# Altium PCB obc-comm.PcbDoc (part 1 of 2)
Units mm, origin at the board's own origin, x right, y up, seen from the top; angles counter-clockwise.
Board outline 60.02 x 35 mm, 4 copper layers (Top Layer, GND, VCC, Bottom Layer), stack 1.11 mm thick; 70 components, 62 nets, 294 pads, 175 vias.
Unrouted connection lines stored in the file: 79.
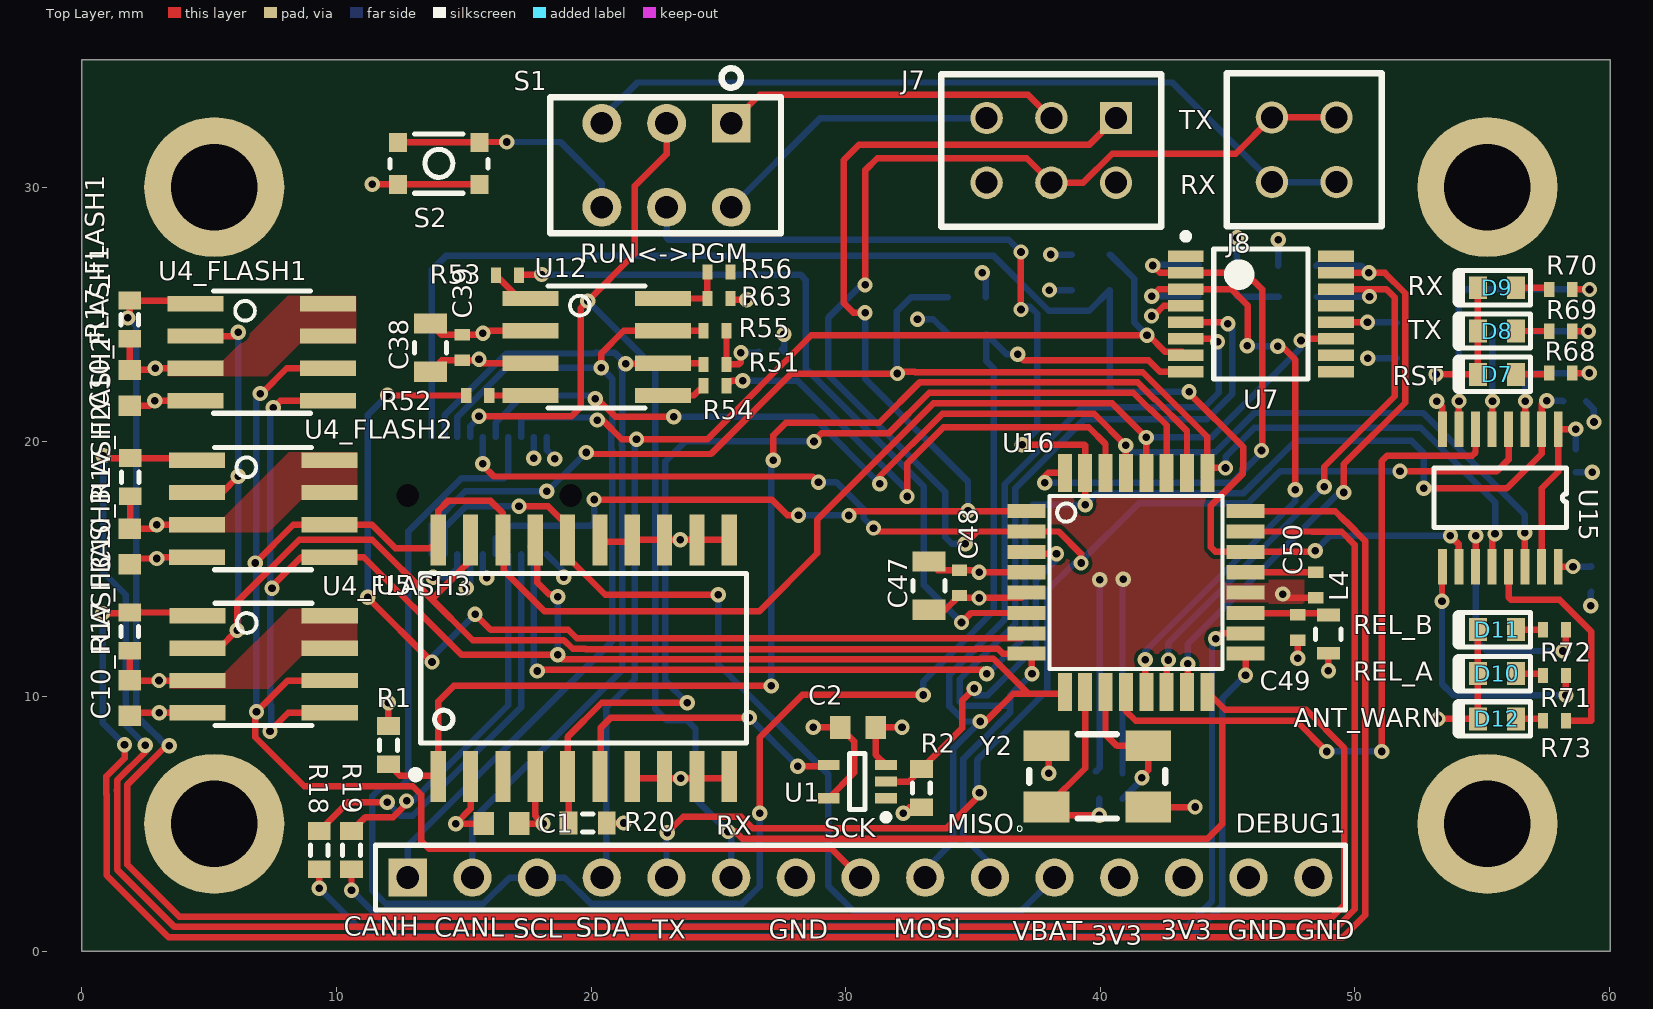
[diagram p0: Top Layer view]
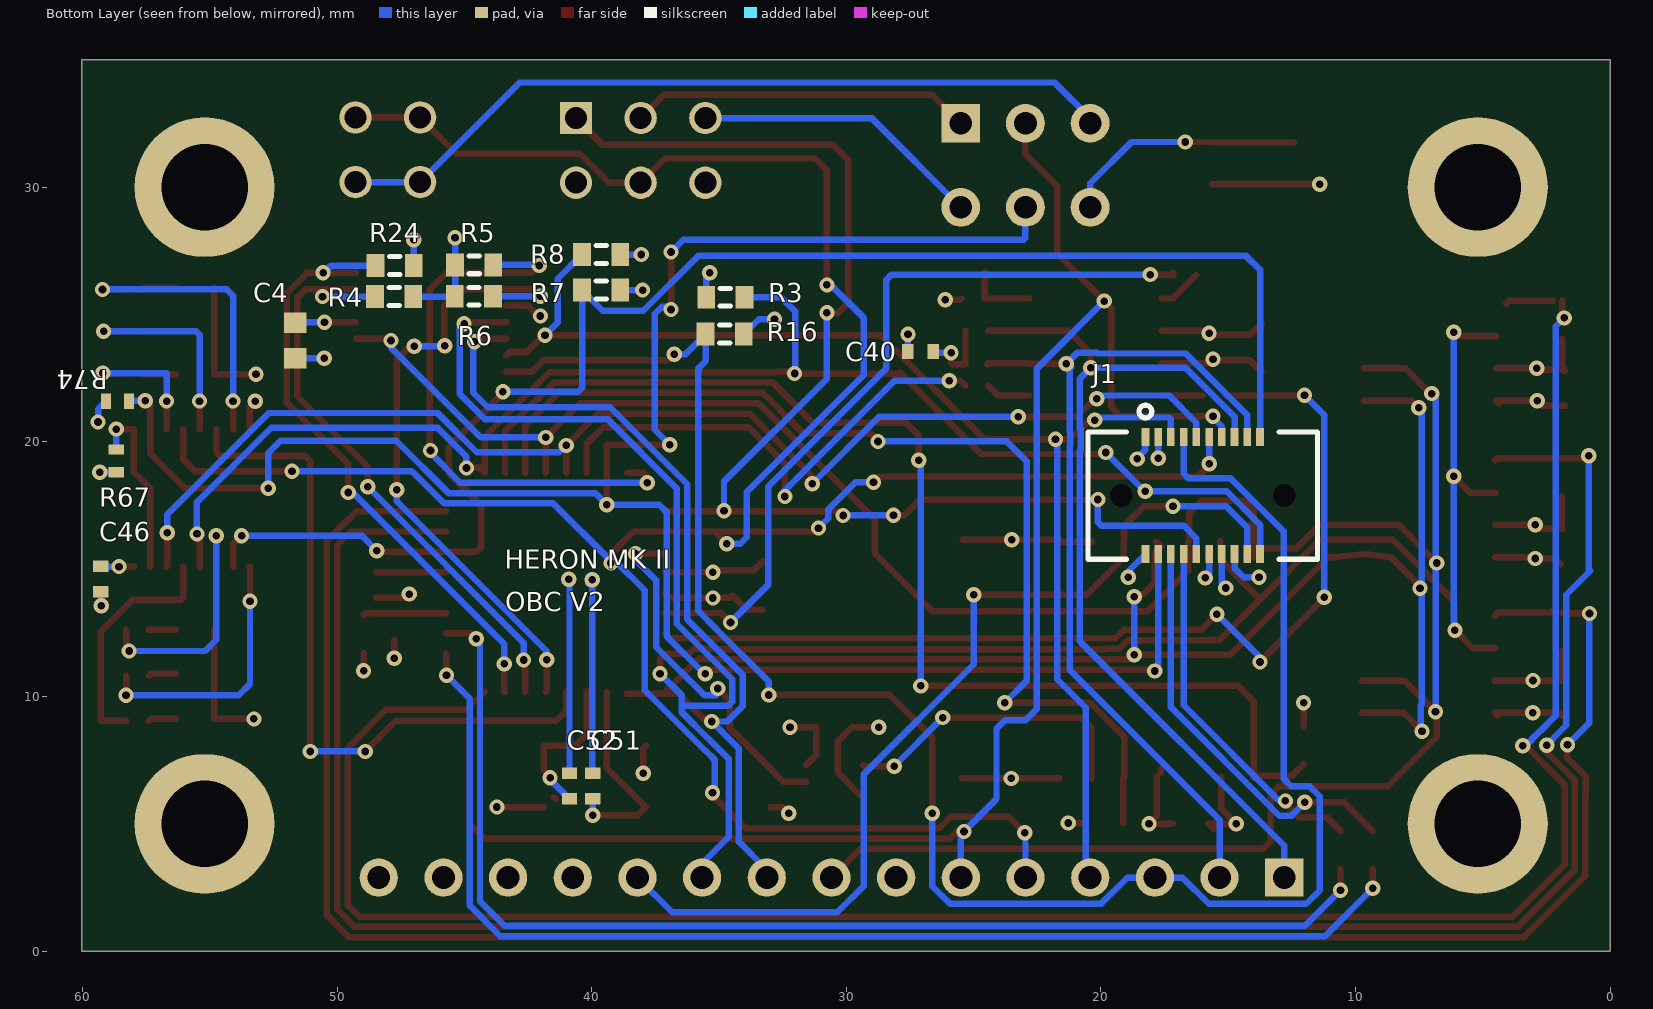
[diagram p1: Bottom Layer view, seen from below]
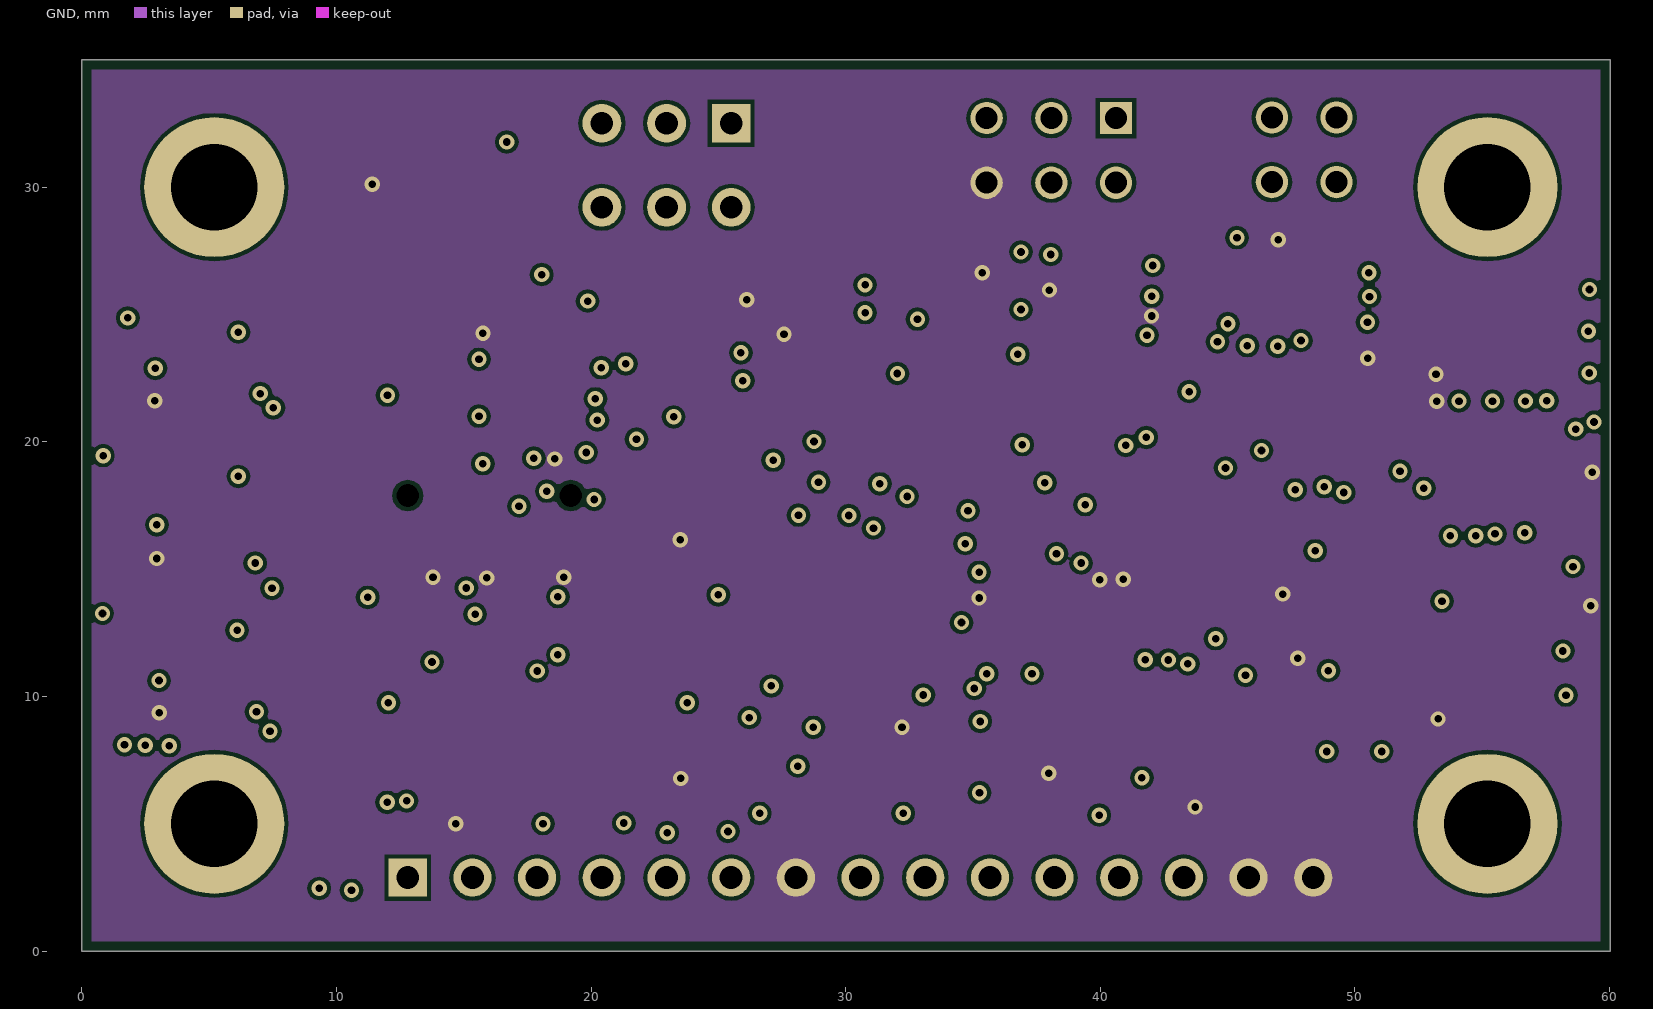
[diagram p2: GND]
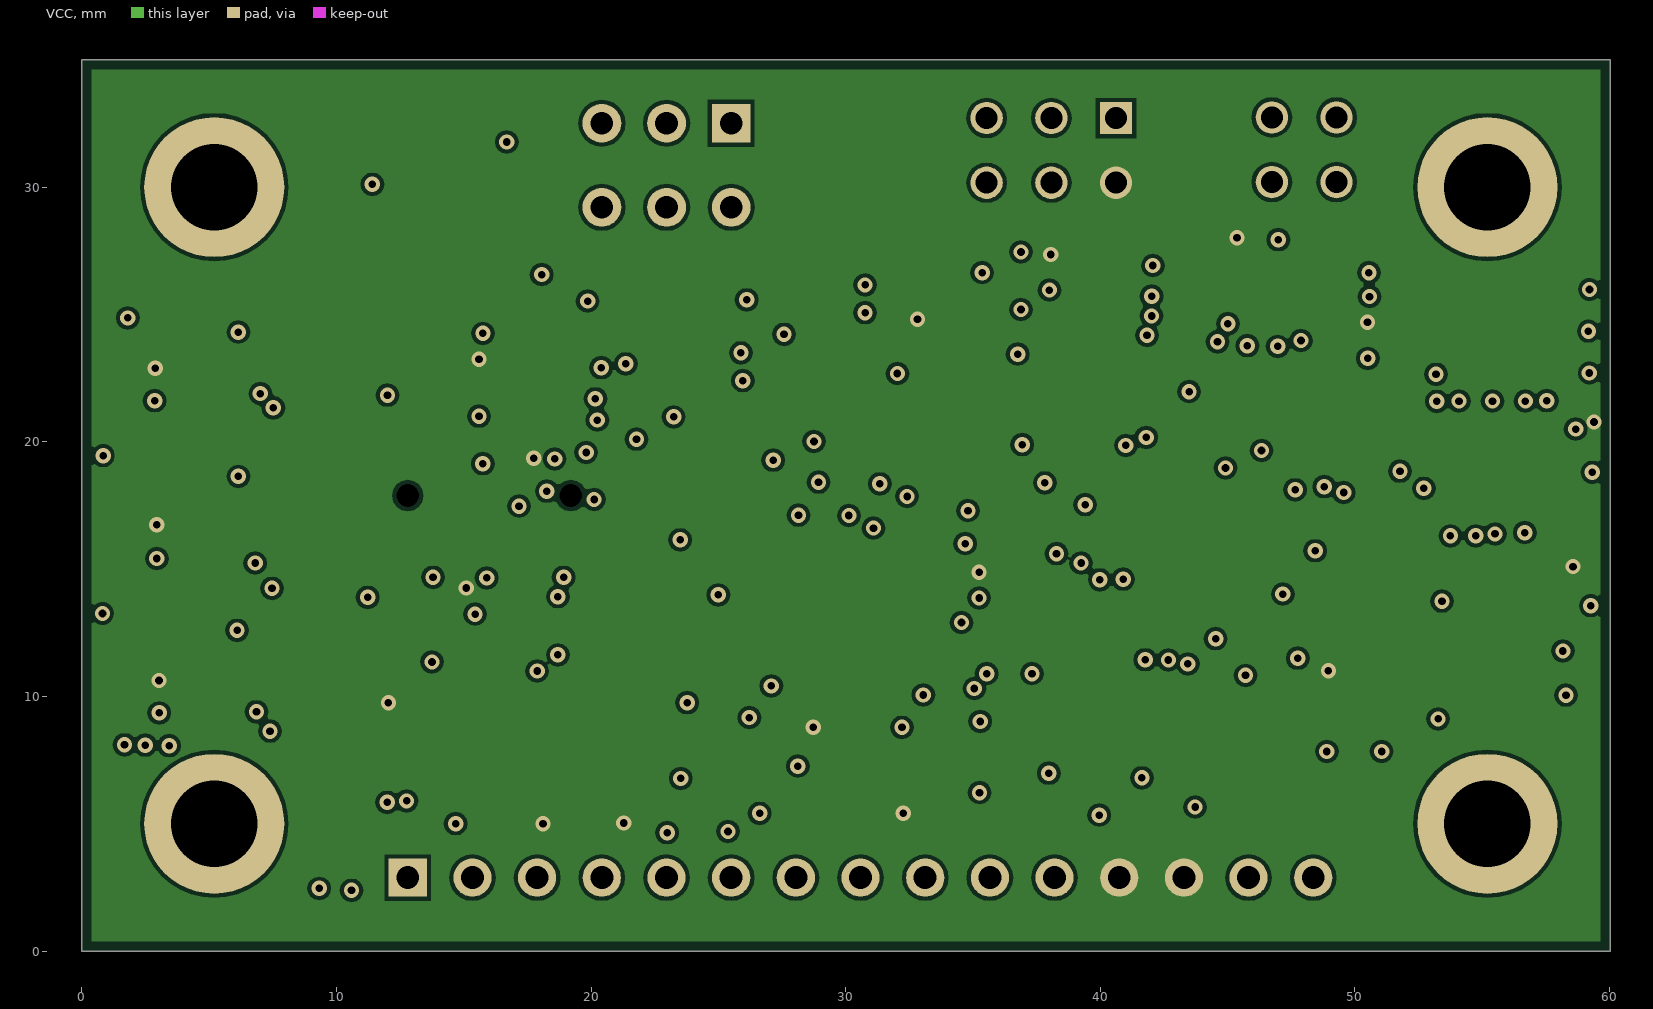
[diagram p3: VCC]
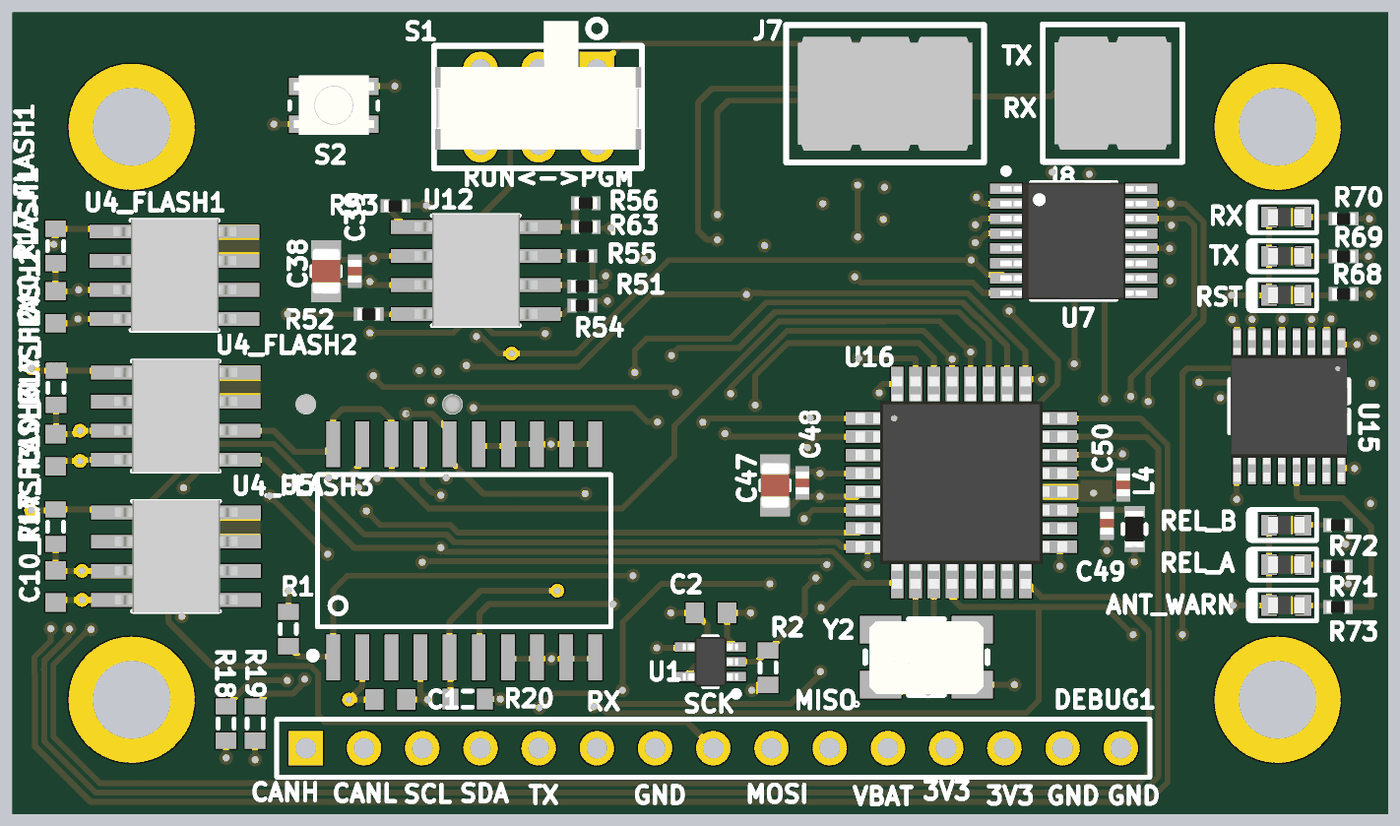
[diagram p4: 3D render of the assembled board from above, using the file's embedded part models]

## Layer stack, top to bottom
Top Solder: solder mask 0.0254, SM-001, Dk 4
Top Layer: signal copper 0.035
Dielectric 1: prepreg 0.1295, PP-017, Dk 4.3
GND: signal copper 0.035
Dielectric 3: core 0.7112, Core-039, Dk 4.8
VCC: signal copper 0.035
Dielectric 5: prepreg 0.1295, PP-017, Dk 4.3
Bottom Layer: signal copper 0.035
Bottom Solder: solder mask 0.0254, SM-001, Dk 4

## Board outline
0,0 0,35.001 60.02,35.001 60.02,0

## Design rules (kind name [scope] priority, off if disabled: settings)
AssemblyTestPointUsage [All] p1 off:
AssemblyTestpoint [All] p1 off: testpointundercomponent=TRUE minsize=1.016 maxsize=2.54 preferedsize=1.524 minholesize=0 maxholesize=1.016 preferedholesize=0.813 testpointgrid=0.025 usegrid=TRUE gridtolerance=0 allowsidetop=TRUE allowsidebottom=TRUE
BoardOutlineClearance [OnLayer('VCC') or OnLayer('GND')] p1: gap=0.508 ignorepadtopadclearanceinfootprint=FALSE // Inner layer clearance
BoardOutlineClearance BoardOutlineClearance_1 [All] p2: gap=0.381 ignorepadtopadclearanceinfootprint=FALSE // top and bottom layers
Clearance [All] p1: gap=0.152 ignorepadtopadclearanceinfootprint=FALSE
FabricationTestPointUsage [All] p1 off: valid=0 allowmultiple=FALSE
FabricationTestpoint [All] p1 off: side=3 testpointundercomponent=FALSE minsize=1.016 maxsize=2.54 preferedsize=1.524 minholesize=0 maxholesize=1.016 preferedholesize=0.813 testpointgrid=0.025 allowsidetop=TRUE allowsidebottom=TRUE usegrid=TRUE gridtolerance=0
Height [All] p1: minheight=0 maxheight=15 prefheight=12.7
HoleSize [All] p1: absolutevalues=TRUE maxlimit=6.3 minlimit=0.3 maxpercent=80.000 minpercent=20.000
HoleToHoleClearance [All] p1: gap=0.254 allowstackedmicrovias=FALSE
MinimumAnnularRing [All] p1: minimumring=0.15
MinimumSolderMaskSliver [All] p1: minsoldermaskwidth=0.102
PlaneConnect [All] p1: planeconnectstyle=Direct reliefexpansion=0.508 reliefentries=4 reliefconductorwidth=0.254 reliefairgap=0.254
PolygonConnect [All] p1: connectstyle=Direct reliefconductorwidth=0.254 reliefentries=4 polygonreliefangle="90 Angle" airgapwidth=0.254
RoomDefinition obc_main_3.0 [InComponentClass('obc_main_3.0')] p1: confinementstyle=ConfineIn formatcopy=TRUE lockcomponents=FALSE outline 8.468,2.458 8.468,5.466 11.146,5.466 11.146,21.794 33.243,21.794 33.243,26.533 38.12,26.533 38.12,26.813 41.128,26.813 41.128,4.509 49.984,4.509 49.984,1.261 11.176,1.261 11.176,2.458
RoomDefinition U_obc_rtc [InComponentClass('U_obc_rtc')] p2: confinementstyle=ConfineIn formatcopy=TRUE lockcomponents=FALSE outline 11.186,6.583 11.186,9.591 12.552,9.591 12.552,17.469 26.464,17.469 26.464,9.642 31.984,9.642 31.984,8.284 32.534,8.284 32.534,7.905 33.823,7.905 33.823,4.897 32.534,4.897 32.534,4.751 21.367,4.751 21.367,4.175 17.989,4.175 17.989,4.15 14.981,4.15 14.981,5.534 12.552,5.534 12.552,6.583
RoomDefinition U_micro-circuit-ATMEGA64M1 [InComponentClass('U_micro-circuit-ATMEGA64M1')] p3: confinementstyle=ConfineIn formatcopy=TRUE lockcomponents=FALSE outline 11.742,29.383 11.742,32.491 18.009,32.491 18.009,35.052 27.838,35.052 27.838,34.823 42.774,34.823 42.774,28.067 27.838,28.067 27.838,27.813 18.009,27.813 18.009,29.383
RoomDefinition ATMEGA64M1 [InComponentClass('ATMEGA64M1')] p4: confinementstyle=ConfineIn formatcopy=TRUE lockcomponents=FALSE outline 32.295,12.747 32.295,15.955 36.035,15.955 36.035,19.845 36.035,22.144 57.719,22.144 59.527,22.144 59.527,21.036 49.81,21.036 49.81,11.192 46.769,11.192 46.769,9.111 43.446,9.111 43.446,4.29 36.31,4.29 36.31,9.111 36.035,9.111 36.035,12.747
RoomDefinition U_obc_spi_to_i2c [InComponentClass('U_obc_spi_to_i2c')] p5: confinementstyle=ConfineIn formatcopy=TRUE lockcomponents=FALSE outline 33.269,23.378 33.269,25.086 38.12,25.086 38.12,28.21 42.125,28.21 42.125,28.573 50.483,28.573 50.483,25.482 52.492,25.482 52.492,22.474 50.483,22.474 50.483,21.94 42.125,21.94 42.125,23.378
RoomDefinition FLASH3 [InComponentClass('FLASH3')] p6: confinementstyle=ConfineIn formatcopy=TRUE lockcomponents=FALSE outline 1.444,8.439 1.444,11.447 1.462,11.447 1.462,14.052 3.17,14.052 3.17,14.016 11.153,14.016 11.153,8.505 3.152,8.505 3.152,8.439
RoomDefinition FLASH2 [InComponentClass('FLASH2')] p7: confinementstyle=ConfineIn formatcopy=TRUE lockcomponents=FALSE outline 1.366,17.109 1.366,20.117 3.104,20.117 3.104,20.129 11.139,20.129 11.139,14.618 3.119,14.618 3.119,14.392 1.411,14.392 1.411,17.109
RoomDefinition FLASH1 [InComponentClass('FLASH1')] p8: confinementstyle=ConfineIn formatcopy=TRUE lockcomponents=FALSE outline 1.386,23.296 1.386,26.304 3.094,26.304 3.094,26.276 11.088,26.276 11.088,20.765 3.115,20.765 3.115,20.716 1.407,20.716 1.407,23.296
RoomDefinition U_can-SN65HVD233 [InComponentClass('U_can-SN65HVD233')] p9: confinementstyle=ConfineIn formatcopy=TRUE lockcomponents=FALSE outline 12.712,22.094 12.712,25.302 15.809,25.302 15.809,27.097 24.115,27.097 24.115,27.224 25.923,27.224 25.923,24.1 28.055,24.1 28.055,22.992 25.771,22.992 25.771,21.646 24.236,21.646 24.236,20.968 16.201,20.968 16.201,21.265 14.646,21.265 14.646,22.094
RoomDefinition micro-circuit- [InComponentClass('micro-circuit-')] p10: confinementstyle=ConfineIn formatcopy=TRUE lockcomponents=FALSE outline 53.572,8.088 53.572,13.653 53.572,27.082 57.254,27.082 57.254,26.538 58.986,26.538 58.986,20.157 59.228,20.157 59.228,15.584 59.838,15.584 59.838,13.626 58.74,13.626 58.74,8.488 57.254,8.488 57.254,8.088
RoutingVias [All] p1: holewidth=0.3 width=0.6 viastyle="Through Hole" minholewidth=0.2 minwidth=0.6 maxholewidth=6.3 maxwidth=10
SilkToSilkClearance [All] p1: silktosilkclearance=0
SilkToSolderMaskClearance [IsPad] p1: minsilkscreentomaskgap=0.076 clearancetoexposedcopper=TRUE
SolderMaskExpansion [All] p1: expansion=0.064
UnConnectedPin [All] p1:
UnRoutedNet [All] p1: checkbadconnections=TRUE
Width [All] p1: maxlimit=2.54 minlimit=0.152 preferedwidth=0.254
18 further rules are at their usual default settings.

## Classes and differential pairs
component class U_obc_spi_to_i2c: C4 R4 R5 R6 R8 R16 R24 U7
channel class obc_flash: FLASH1 FLASH2 FLASH3
component class micro-circuit-: C46 D7 D8 D9 D10 D11 D12 R67 R68 R69 R70 R71 R72 R73
component class ATMEGA64M1: C47 C48 C49 C50 C51 C52 L4 R74 U16 Y2
net class MEM_CSn[1..3]: MEM_CSn1 MEM_CSn2 MEM_CSn3
component class U_obc_rtc: C1 C2 R1 R2 R20 U1 U5
component class U_can-SN65HVD233: C38 C39 C40 R51 R52 R53 R54 R55 R56 R63
component class U_micro-circuit-ATMEGA64M1: J7 P3 S1 S2
component class obc_main_3.0: DEBUG1 J1 R3 R7 R18 R19
component class FLASH3: C10_FLASH3 R17_FLASH3 R33_FLASH3 U4_FLASH3
component class FLASH2: R17_FLASH2 R33_FLASH2 U4_FLASH2
component class FLASH1: C10_FLASH1 R17_FLASH1 R33_FLASH1 U4_FLASH1

## Components (designator, comment, footprint, x,y, rotation, side; value= is the part's Value field where it differs from the comment)
C1 "0.1uF" 1608[0603] 16.485,5.004 r0 top
C2 "0.1uF" 1608[0603] 30.48,8.788 r180 top
C4 "0.1uF" 1608[0603] 51.638,23.978 r90 bottom
C10_FLASH1 "0.1uF" 1608[0603] 1.88,22.123 r270 top (schematic designator C10)
C10_FLASH2 "0.1uF" 1608[0603] 1.88,15.888 r270 top (schematic designator C10)
C10_FLASH3 "0.1uF" 1608[0603] 1.88,9.943 r270 top (schematic designator C10)
C38 "0805" CAP0805R 13.691,23.698 r270 top value=10uF
C39 "0402" CAP0402R 14.935,23.698 r270 top value=0.1uF
C40 "0402" CAP0402R 27.076,23.546 r180 bottom value=47pF
C46 "0402" CAP0402R 59.284,14.605 r90 bottom value=0.1uF
C47 "0805" CAP0805R 33.274,14.351 r90 top value=10uF
C48 "0402" CAP0402R 34.468,14.464 r90 top value=0.1uF
C49 "0402" CAP0402R 47.752,12.7 r90 top value=0.1uF
C50 "0402" CAP0402R 48.463,14.376 r90 top value=0.1uF
C51 "0402" CAP0402R 39.954,6.477 r270 bottom value=22pF
C52 "0402" CAP0402R 40.869,6.477 r270 bottom value=22pF
D7 "LED0603" LED0603 55.575,22.652 r180 top
D8 "LED0603" LED0603 55.575,24.353 r180 top
D9 "LED0603" LED0603 55.575,26.053 r180 top
D10 "LED0603" LED0603 55.575,10.897 r180 top
D11 "LED0603" LED0603 55.575,12.624 r180 top
D12 "LED0603" LED0603 55.575,9.119 r180 top
DEBUG1 "Header 15" HDR1X15 12.8,2.885 r0 top
J1 "SLH-010-1.50-G-D-A" SLH-010-1.50-G-D-A 16,17.89 r0 bottom locked
J7 "SLW-103-01-G-D" SLW-103-01-X-D 38.075,31.445 r0 top
J8 "SLW-102-01-G-D" SLW-102-01-X-D 48.006,31.471 r0 top
L4 "0603" RES0603R 48.956,12.446 r90 top value=10uH
R1 "10K" J1-0603 12.04,8.087 r90 top
R2 "10K" J1-0603 32.969,6.401 r270 top
R3 "Res3" J1-0603 34.747,25.679 r180 bottom value=10K
R4 "10K" J1-0603 47.756,25.705 r180 bottom
R5 "10K" J1-0603 44.615,26.949 r0 bottom
R6 "10K" J1-0603 44.622,25.719 r0 bottom
R7 "Res3" J1-0603 39.624,25.959 r0 bottom value=10K
R8 "4.7K" J1-0603 39.624,27.356 r0 bottom
R16 "4.7K" J1-0603 34.773,24.232 r0 bottom
R17_FLASH1 "10K" J1-0603 1.88,24.8 r270 top (schematic designator R17)
R17_FLASH2 "10K" J1-0603 1.9,18.613 r270 top (schematic designator R17)
R17_FLASH3 "10K" J1-0603 1.88,12.548 r270 top (schematic designator R17)
R18 "100" J1-0603 9.322,3.962 r270 top
R19 "100" J1-0603 10.59,3.962 r270 top
R20 "10K" J1-0603 19.863,5.029 r0 top
R24 "10K" J1-0603 47.737,26.924 r0 bottom
R51 "0402" RES0402R 24.867,23.038 r180 top value=60.4
R52 "0402" RES0402R 15.55,21.819 r180 top value=100
R53 "0402" RES0402R 16.713,26.543 r0 top value=100
R54 "0402" RES0402R 24.867,22.2 r0 top value=100
R55 "0402" RES0402R 24.867,24.359 r180 top value=60.4
R56 "0402" RES0402R 25.019,26.67 r0 top value=0
R63 "0402" RES0402R 25.019,25.629 r180 top value=0
R67 "0402" RES0402R 58.674,19.253 r90 bottom value=10K
R68 "0402" RES0402R 58.082,22.703 r0 top value=330
R69 "0402" RES0402R 58.082,24.343 r0 top value=330
R70 "0402" RES0402R 58.082,25.984 r0 top value=330
R71 "0402" RES0402R 57.836,10.82 r0 top value=330
R72 "0402" RES0402R 57.836,12.624 r0 top value=330
R73 "0402" RES0402R 57.836,9.042 r0 top value=330
R74 "0402" RES0402R 58.623,21.59 r0 bottom value=30K
S1 "DPDT" "JS202011AQN - Slide Switch" 22.962,30.861 r270 top
S2 "SW-PB" "PTS830GM140 SMTR LFS - Pushbutton" 14.021,30.937 r0 top
U1 "SN74LVC1G07" SOT65P210X110-5N 30.455,6.655 r180 top
U4_FLASH1 "SST26VF016B" SOIC127P500X600-8N 7.07,23.52 r270 top (schematic designator U4)
U4_FLASH2 "SST26VF016B" SOIC127P500X600-8N 7.121,17.374 r270 top (schematic designator U4)
U4_FLASH3 "SST26VF016B" SOIC127P500X600-8N 7.136,11.26 r270 top (schematic designator U4)
U5 "DS3234" SOIC127P1032X265-20 19.71,11.501 r90 top
U7 "SC18IS600IPW/S8HP" TSOP65P640X110-16N 46.304,25.019 r0 top
U12 "SN65HVD233D" SOIC127P500X600-8N 20.218,23.724 r270 top
U15 "SN74HC365PW" SOP65P640X120-16N 57.982,20.5 r270 top
U16 "ATMEGA64M1" QFP80P900X900X120-32 41.402,14.478 r0 top
Y2 "8MHz Crystal" OSCSC500X320X110-4N 39.878,6.858 r90 top

## Footprints (in the part's own frame and the unit in brackets; to place one, negate y for a bottom-side part, rotate by r counter-clockwise, add the part's x,y. Pads: shape width x height; smd on the part's side, far side on the other; paste and mask are expansions set on the pad)
1608[0603] [mm] "Chip Capacitor, Body 1.6x0.8mm, IPC High Density"
  rect 0.8x0.9 smd: 1(-0.7,0) 2(0.7,0)
  body extent -0.87,-0.48 0.87,0.48, height 1.3
CAP0402R [mm] "Capacitor 0402 reflow soldering"
  rect 0.45x0.6 smd mask+0: 1(-0.5,0) 2(0.5,0)
  body extent -0.5,-0.3 0.5,0.3, height 0.2
CAP0805R [mm] "capacitor 0805 reflow soldering"
  rect 0.8x1.3 smd mask+0: 1(-0.95,0) 2(0.95,0)
  silkscreen extent -0.2,-0.63 0.2,0.63, body extent -1,-0.62 1,0.63, height 0.78
HDR1X15 [mm] "Connector; Header; 15 Position"
  rect 1.5x1.5 hole 0.9: 1(0,0)
  round 1.5 hole 0.9: 2(2.54,0) 3(5.08,0) 4(7.62,0) 5(10.16,0) 6(12.7,0) 7(15.24,0) 8(17.78,0) 9(20.32,0) 10(22.86,0) 11(25.4,0) 12(27.94,0) 13(30.48,0) 14(33.02,0) 15(35.56,0)
  silkscreen extent -1.27,-1.27 36.83,1.27
J1-0603 [mm] "Chip Resistor, Body 1.6x0.8mm, IPC High Density"
  rect 0.7x0.9 smd: 1(-0.75,0) 2(0.75,0)
  silkscreen extent -0.2,-0.35 0.2,0.35, body extent -0.85,-0.48 0.85,0.48, height 0.9
"JS202011AQN - Slide Switch" [mil]
  rect 60x60 hole 35: 1(-65,100)
  round 60 hole 35: 2(-65,0) 3(-65,-100) 4(65,100) 5(65,0) 6(65,-100)
  silkscreen extent -150,-180 105,177, body extent -148,-178 73,176, height 139
LED0603 [mm] "0603 LED footprint, thick line on the cathode"
  rect 0.7x0.9 smd: 1(-0.75,0) 2(0.75,0)
  silkscreen extent -1.32,-0.67 1.52,0.67, body extent -0.8,-0.4 0.8,0.4, height 0.71
OSCSC500X320X110-4N [mm] "ABM3B-8.000MHZ-10-D-1-G-T Abracon 8MHz crystal"
  rect 1.2x1.8 smd: 1(-1.2,2) 2(-1.2,-2) 3(1.2,-2) 4(1.2,2)
  silkscreen extent -2.15,-2.67 1.65,3.15, body extent -1.6,-2.5 1.58,2.5, height 1.1
"PTS830GM140 SMTR LFS - Pushbutton" [mm] "Low profile pushbutton"
  rect 0.7x0.75 smd: 1(-1.6,0.825) 1(1.6,0.825) 2(-1.6,-0.825) 2(1.6,-0.825)
  silkscreen extent -1.92,-1.17 1.92,1.15, body extent -1.75,-1.3 1.75,1.3, height 1.4
QFP80P900X900X120-32 [mm] "QFN + Pitch P + Body With X Body Length X Height - #Pins"
  rect 1.5x0.55 smd: 1(-4.3,2.8) 2(-4.3,2) 3(-4.3,1.2) 4(-4.3,0.4) 5(-4.3,-0.4) 6(-4.3,-1.2) 7(-4.3,-2) 8(-4.3,-2.8) 17(4.3,-2.8) 18(4.3,-2) 19(4.3,-1.2) 20(4.3,-0.4) 21(4.3,0.4) 22(4.3,1.2) 23(4.3,2) 24(4.3,2.8)
  rect 0.55x1.5 smd: 9(-2.8,-4.3) 10(-2,-4.3) 11(-1.2,-4.3) 12(-0.4,-4.3) 13(0.4,-4.3) 14(1.2,-4.3) 15(2,-4.3) 16(2.8,-4.3) 25(2.8,4.3) 26(2,4.3) 27(1.2,4.3) 28(0.4,4.3) 29(-0.4,4.3) 30(-1.2,4.3) 31(-2,4.3) 32(-2.8,4.3)
  silkscreen extent -3.4,-3.4 3.4,3.4, body extent -4.62,-4.62 4.63,4.63, height 1.2
RES0402R [mm] "resistor 0402 reflow soldering"
  rect 0.4x0.6 smd mask+0: 1(-0.45,0) 2(0.45,0)
  body extent -0.5,-0.25 0.5,0.25, height 0.3
RES0603R [mm] "resistor 0603 reflow soldering"
  rect 0.5x0.9 smd mask+0: 1(-0.75,0) 2(0.75,0)
  silkscreen extent -0.2,-0.5 0.2,0.5, body extent -0.8,-0.4 0.8,0.4, height 0.45
SLH-010-1.50-G-D-A [mm]
  rect 0.3x0.7 smd: 1(2.25,-2.3) 2(2.25,2.3) 3(1.75,-2.3) 4(1.75,2.3) 5(1.25,-2.3) 6(1.25,2.3) 7(0.75,-2.3) 8(0.75,2.3) 9(0.25,-2.3) 10(0.25,2.3) 11(-0.25,-2.3) 12(-0.25,2.3) 13(-0.75,-2.3) 14(-0.75,2.3) 15(-1.25,-2.3) 16(-1.25,2.3) 17(-1.75,-2.3) 18(-1.75,2.3) 19(-2.25,-2.3) 20(-2.25,2.3)
  round 0 hole 0.9 unplated: ""(-3.2,0) ""(3.2,0)
  silkscreen extent -4.5,-3.55 4.5,2.5, body extent -4.53,-2.5 4.53,2.5, height 1.78
SLW-102-01-X-D [mil] "CONN RCPT 4POS 0.1 GOLD PCB"
  round 50 hole 34: 1(50,-50) 2(50,50) 3(-50,-50) 4(-50,50)
  silkscreen extent -120,-118 120,118, body extent -100,-97 100,98, height 180
SLW-103-01-X-D [mil] "CONN RCPT 6POS 0.1 GOLD PCB"
  rect 50x50 hole 34: 1(100,50)
  round 50 hole 34: 2(100,-50) 3(0,50) 4(0,-50) 5(-100,50) 6(-100,-50)
  silkscreen extent -170,-118 170,118, body extent -150,-97 150,98, height 180
SOIC127P500X600-8N [mm]
  rect 0.6x2.2 smd: 1(-1.905,-2.6) 2(-0.635,-2.6) 3(0.635,-2.6) 4(1.905,-2.6) 5(1.905,2.6) 6(0.635,2.6) 7(-0.635,2.6) 8(-1.905,2.6)
  silkscreen extent -2.4,-1.9 2.4,1.9, body extent -2.46,-2.67 2.44,2.69, height 2.03
SOIC127P1032X265-20 [mm] "SOIC127P + Nominal Lead Length X Height - Pin #"
  rect 2x0.6 smd: 1(-4.65,5.715) 2(-4.65,4.445) 3(-4.65,3.175) 4(-4.65,1.905) 5(-4.65,0.635) 6(-4.65,-0.635) 7(-4.65,-1.905) 8(-4.65,-3.175) 9(-4.65,-4.445) 10(-4.65,-5.715) 11(4.65,-5.715) 12(4.65,-4.445) 13(4.65,-3.175) 14(4.65,-1.905) 15(4.65,-0.635) 16(4.65,0.635) 17(4.65,1.905) 18(4.65,3.175) 19(4.65,4.445) 20(4.65,5.715)
  silkscreen extent -4.72,-6.4 3.32,6.75
SOP65P640X120-16N [mm] "SOP + Pitch P + Lead Span Nominal X Height - #Pins"
  rect 1.4x0.35 smd: 1(0,0) 2(0,-0.65) 3(0,-1.3) 4(0,-1.95) 5(0,-2.6) 6(0,-3.25) 7(0,-3.9) 8(0,-4.55) 9(5.4,-4.55) 10(5.4,-3.9) 11(5.4,-3.25) 12(5.4,-2.6) 13(5.4,-1.95) 14(5.4,-1.3) 15(5.4,-0.65) 16(5.4,0)
  silkscreen extent 1.53,-4.88 3.87,0.33, body extent -0.61,-4.84 5.99,0.27, height 1.2
SOT65P210X110-5N [mm] "SOT23, 5-Leads, Body 2.00x2.10mm, Pitch 0.65mm, IPC Medium Density"
  rect 0.85x0.4 smd: 1(-1.125,0.65) 2(-1.125,0) 3(-1.125,-0.65) 4(1.125,-0.65) 5(1.125,0.65)
  silkscreen extent -1.25,-1.1 0.3,1.52, body extent -1.2,-1.07 1.2,1.07, height 1.1
TSOP65P640X110-16N [mm] "TSOP, 16-Leads, Body 5.00x4.40mm, Pitch 0.65mm, IPC Medium Density"
  rect 1.4x0.45 smd: 1(-2.95,2.275) 2(-2.95,1.625) 3(-2.95,0.975) 4(-2.95,0.325) 5(-2.95,-0.325) 6(-2.95,-0.975) 7(-2.95,-1.625) 8(-2.95,-2.275) 9(2.95,-2.275) 10(2.95,-1.625) 11(2.95,-0.975) 12(2.95,-0.325) 13(2.95,0.325) 14(2.95,0.975) 15(2.95,1.625) 16(2.95,2.275)
  silkscreen extent -3.07,-2.55 1.85,3.17, body extent -3.2,-2.55 3.2,2.55, height 1.1

## Part data
C1 C2 C4: library part Cap, "Capacitor", Supplier Part Number 1=399-1095-6-ND, LatestRevisionDate=17-Jul-2002, LatestRevisionNote="Re-released for DXP Platform.", PackageDescription="Radial Cap, Thru-Hole; 2 Leads; 0.3 in Pin Spacing", PackageReference=RAD-0.3, Published=8-Jun-2000, Publisher="Altium Limited", Supplier 1=Digi-Key
C10_FLASH1 C10_FLASH2 C10_FLASH3: library part "Cap Semi", "Capacitor (Semiconductor SIM Model)", Supplier Part Number 1=399-1095-6-ND, LatestRevisionDate=29-May-2009, LatestRevisionNote="IPC-7351 Footprint Added.", PackageDescription="Chip Capacitor", PackageReference=C1206, Published=8-Jun-2000, Publisher="Altium Limited", Supplier 1=Digi-Key
C38 C47: library part CAP0805, "0805 capacitor", Capacitance=10uF, Dielectric=X7R, Manufacturer=Murata, Manufacturer Part Number=GCM21BR70J106KE22K, Max Operating Temperature=125°C, Min Operating Temperature=-55°C, Supplier Part Number 1=490-14361-1-ND, Tolerance=10%, Voltage Rating (DC)=6.3V, Case/Package=0805, Depth=1.25mm, Lead Free="Lead Free", Length=2mm, Packaging="Tape and Reel", Pricing 1="1=0.42, 10=0.29, 100=0.1742, 500=0.13064, 1000=0.11031, 2500=0.10451, 5000=0.0987 (USD)", Stock 1=214938, Supplier 1=Digi-Key
C39 C46 C48 C49 C50: library part CAP0402, "0402 capacitor", Capacitance=100nF, Case Code (Metric)=1005, Dielectric=X7R, Manufacturer="Taiyo Yuden", Manufacturer Part Number=EMK105B7104KVHF, Max Operating Temperature=125°C, Min Operating Temperature=-55°C, Package Quantity=10000, Ratings=AEC-Q200, Supplier Part Number 1=587-3807-1-ND, Tolerance=10%, Voltage Rating=16V, Case/Package=0402, Case Code (Imperial)=0402, Halogen Free="Halogen Free", Height=0.5mm, Lead Free="Lead Free", Length=0.039inch, Mount="Surface Mount", Packaging="Tape and Reel", Pricing 1="1=0.1, 10=0.057, 100=0.0254, 500=0.01812, 1000=0.01423, 2500=0.01294, 5000=0.0119 (USD)", Stock 1=18196, Supplier 1=Digi-Key, Termination=SMD/SMT, Thickness=0.022inch, Voltage Rating (DC)=16V, Weight=2.3E-05oz, Width=0.02inch
C40: library part CAP0402, "0402 capacitor", Capacitance=47pF, Dielectric=X7R, Manufacturer=KEMET, Manufacturer Part Number=C0402C470J3RACAUTO, Max Operating Temperature=125°C, Min Operating Temperature=-55°C, Supplier Part Number 1=399-17558-1-ND, Tolerance=5%, Case/Package=0402, Depth=0.5mm, Length=1mm, Packaging="Tape and Reel", Pricing 1="1=0.15, 10=0.104, 100=0.0489, 500=0.0343, 1000=0.0284, 2500=0.02643, 5000=0.02418 (USD)", Stock 1=18140, Supplier 1=Digi-Key
C51 C52: library part CAP0402, "0402 capacitor", Capacitance=22pF, Case Code (Metric)=1005, Manufacturer=KEMET, Manufacturer Part Number=C0402C220K4RAC7867, Max Operating Temperature=125°C, Min Operating Temperature=-55°C, Supplier Part Number 1=399-17554-1-ND, Tolerance=10%, Voltage Rating=16V, Case/Package=0402, Case Code (Imperial)=0402, Mount="Surface Mount", Packaging="Tape and Reel", Pricing 1="1=0.19, 10=0.132, 100=0.062, 500=0.0435, 1000=0.03601, 2500=0.03351, 5000=0.03066 (USD)", Stock 1=68765, Supplier 1=Digi-Key
D7 D8 D9 D10 D11 D12: "Generic 0603 LED. Use ChipLED from Osram for generic ones."
DEBUG1: "Header, 15-Pin", Supplier Part Number 1=SAM1087-15-ND, LatestRevisionDate=17-Jul-2002, LatestRevisionNote="Re-released for DXP Platform.", Publisher="Altium Limited", Supplier 1=Digi-Key
J1: "0.50 mm Razor Beam™ LP Ultra Low Profile Socket Strip, alignment pin option", Supplier Part Number 1=Samtec, ComponentLink1Description="Product Page", ComponentLink1URL=https://www.samtec.com/products/slh-010-1.50-g-d-a, Supplier 1=SLH-010-1.50-G-D-A
J7: "6 pos 100mil pitch low profile header", Supplier Part Number 1=SAM1088-03-ND, Supplier 1=Digi-Key
J8: "4 pos 100mil pitch low profile header", Supplier Part Number 1=SAM1088-02-ND, Supplier 1=Digi-Key
L4: library part Inductor, "Inductor", Case Code (Metric)=1608, Current Rating=300mA, DC Resistance (DCR)=780mR, Inductance=10uH, Manufacturer=TDK, Manufacturer Part Number=MLZ1608N100LTD25, Max Operating Temperature=125°C, Min Operating Temperature=-55°C, Package Quantity=4000, Ratings=AEC-Q200, Saturation Current=60mA, Supplier Part Number 1=445-17067-1-ND, Test Frequency=2MHz, Tolerance=20%, Case/Package=0603, Case Code (Imperial)=0603, Code_IEC=1005, Code_JEITA=0402, Core Material=Ferrite, Height=0.8mm, Height - Seated (Max)=0.037inch, LatestRevisionDate=29-May-2009, LatestRevisionNote="IPC-7351 Footprint Added.", Lead Free="Lead Free", Length=0.063inch, Max DC Current=300mA, Mount="Surface Mount", PackageDescription="Chip Inductor", PackageReference=0402-A, Packaging="Tape and Reel", Pricing 1="1=0.22, 10=0.202, 100=0.1346, 500=0.11212, 1000=0.09419 (USD)", Published=8-Jun-2000, Publisher="Altium Limited", Shielding=Shielded, Stock 1=11876, Supplier 1=Digi-Key, Termination=SMD/SMT, Weight=0.000141oz, Width=0.8mm
R1 R2 R4 R5 R6 R17_FLASH1 R17_FLASH2 R17_FLASH3 R20 R24: library part Res3, "Resistor", Supplier Part Number 1=P10.0KHDKR-ND, LatestRevisionDate=29-May-2009, LatestRevisionNote="IPC-7351 Footprint Added.", PackageDescription="Chip Resistor", PackageReference=J1-0603, Published=8-Jun-2000, Publisher="Altium Limited", Supplier 1=Digi-Key
R3 R7: "Resistor", LatestRevisionDate=29-May-2009, LatestRevisionNote="IPC-7351 Footprint Added.", PackageDescription="Chip Resistor", PackageReference=J1-0603, Published=8-Jun-2000, Publisher="Altium Limited"
R8 R16: library part Res3, "Resistor", LatestRevisionDate=29-May-2009, LatestRevisionNote="IPC-7351 Footprint Added.", PackageDescription="Chip Resistor", PackageReference=J1-0603, Published=8-Jun-2000, Publisher="Altium Limited"
R18 R19: library part Res3, "Resistor", Supplier Part Number 1=P100HCT-ND, LatestRevisionDate=29-May-2009, LatestRevisionNote="IPC-7351 Footprint Added.", PackageDescription="Chip Resistor", PackageReference=J1-0603, Published=8-Jun-2000, Publisher="Altium Limited", Supplier 1=Digi-Key
R51 R55: library part RES0402, "0402 resistor", Case Code (Metric)=1005, Manufacturer=Vishay, Manufacturer Part Number=CRCW040260R4FKED, Max Operating Temperature=155°C, Max Power Dissipation=63mW, Min Operating Temperature=-55°C, Package Quantity=10, Resistance=60.4R, Supplier Part Number 1=541-60.4LCT-ND, Temperature Coefficient=100ppm/°C, Tolerance=1%, Voltage Rating=50V, Case/Package=0402, Case Code (Imperial)=0402, ComponentLink1Description=https://www.alliedelec.com/m/d/0c934d6939ccefa68dbe0b96d821c8cf.pdf?src-supplier=Allied+Electronics, ComponentLink1URL=https://www.alliedelec.com/m/d/0c934d6939ccefa68dbe0b96d821c8cf.pdf?src-supplier=Allied+Electronics, ComponentLink2Description=http://www.farnell.com/datasheets/1697337.pdf?src-supplier=Element14, ComponentLink2URL=http://www.farnell.com/datasheets/1697337.pdf?src-supplier=Element14, ComponentLink3Description=http://www.vishay.com/docs/20035/dcrcwe3.pdf?src-supplier=Digi-Key, ComponentLink3URL=http://www.vishay.com/docs/20035/dcrcwe3.pdf?src-supplier=Digi-Key, ComponentLink4Description=http://www.farnell.com/datasheets/2111203.pdf?src-supplier=Element14, ComponentLink4URL=http://www.farnell.com/datasheets/2111203.pdf?src-supplier=Element14, ComponentLink5Description=http://www.vishay.com/docs/20035/dcrcwe3.pdf?src-supplier=Future+Electronics, ComponentLink5URL=http://www.vishay.com/docs/20035/dcrcwe3.pdf?src-supplier=Future+Electronics, Composition="Thick Film", Contact Plating=Tin, Depth=0.5mm, Features="Automotive AEC-Q200", Height=0.35mm, Lead Free="Lead Free", Length=1mm, Military Standard=Not, Number of Terminations=2, Packaging="Tape and Reel", Power Rating=63mW, Pricing 1="1=0.1, 10=0.038, 100=0.0154, 1000=0.0069, 2500=0.00599, 5000=0.00495 (USD)", Radiation Hardening=No, REACH SVHC=Unknown, Stock 1=132015, Supplier 1=Digi-Key, Termination=Solder, Voltage Rating (DC)=50V, Weight=2.3E-05oz, Width=0.5mm
R52 R53 R54: library part RES0402, "0402 resistor", Case Code (Metric)=1005, Manufacturer="Vishay Dale", Manufacturer Part Number=CRCW0402100RFKEDHP, Max Operating Temperature=155°C, Min Operating Temperature=-55°C, Package Quantity=10000, Power Rating=125mW, Resistance=100R, Supplier Part Number 1=541-100YCT-ND, Temperature Coefficient=100ppm/°C, Tolerance=1%, Voltage Rating=50V, Case/Package=0402, Case Code (Imperial)=0402, ComponentLink1Description=http://www.vishay.com/docs/20043/crcwhpe3.pdf?src-supplier=Avnet, ComponentLink1URL=http://www.vishay.com/docs/20043/crcwhpe3.pdf?src-supplier=Avnet, Composition="Thick Film", Contact Plating=Tin, Depth=0.5mm, Height=0.3mm, Lead Free="Lead Free", Length=1mm, Mount="Surface Mount", Packaging="Tape and Reel", Pricing 1="1=0.15, 10=0.138, 100=0.0532, 1000=0.02343, 2500=0.02023, 5000=0.0181 (USD)", Radiation Hardening=No, REACH SVHC=Unknown, Stock 1=530594, Supplier 1=Digi-Key, Termination=SMD/SMT, Voltage Rating (DC)=50V, Weight=2.3E-05oz, Width=0.5mm
R56 R63: library part RES0402, "0402 resistor", Case Code (Metric)=1005, Manufacturer=Panasonic, Manufacturer Part Number=ERJ-2GE0R00X, Max Operating Temperature=155°C, Max Power Dissipation=100mW, Min Operating Temperature=-55°C, Package Quantity=1, Resistance=0mR, Supplier Part Number 1=P0.0JCT-ND, Temperature Coefficient=600ppm/°C, Tolerance=5%, Voltage Rating=50V, Case/Package=0402, Case Code (Imperial)=0402, ComponentLink1Description=http://industrial.panasonic.com/www-data/pdf/AOA0000/AOA0000CE1.pdf?src-supplier=Avnet, ComponentLink1URL=http://industrial.panasonic.com/www-data/pdf/AOA0000/AOA0000CE1.pdf?src-supplier=Avnet, ComponentLink2Description=http://www.alliedelec.com/m/d/51cd0790071e1666bdb9d00c57fcf960.pdf?src-supplier=Allied+Electronics, ComponentLink2URL=http://www.alliedelec.com/m/d/51cd0790071e1666bdb9d00c57fcf960.pdf?src-supplier=Allied+Electronics, ComponentLink3Description=http://industrial.panasonic.com/www-data/pdf/AOA0000/AOA0000CE1.pdf?src-supplier=Avnet+Europe, ComponentLink3URL=http://industrial.panasonic.com/www-data/pdf/AOA0000/AOA0000CE1.pdf?src-supplier=Avnet+Europe, ComponentLink4Description=http://www.farnell.com/datasheets/2059623.pdf?src-supplier=Farnell, ComponentLink4URL=http://www.farnell.com/datasheets/2059623.pdf?src-supplier=Farnell, ComponentLink5Description=http://www.farnell.com/datasheets/2059623.pdf?src-supplier=Element14, ComponentLink5URL=http://www.farnell.com/datasheets/2059623.pdf?src-supplier=Element14, ComponentLink6Description=http://www.farnell.com/datasheets/1678796.pdf?src-supplier=Element14, ComponentLink6URL=http://www.farnell.com/datasheets/1678796.pdf?src-supplier=Element14, Composition="Thick Film", Contact Plating=Tin, Depth=0.5mm, Features="Automotive AEC-Q200", Height=0.35mm, Lead Free="Lead Free", Length=1mm, Military Standard=Not, Mount="Surface Mount", Number of Terminations=2, Packaging="Tape and Reel", Power Rating=100mW, Pricing 1="1=0.1, 10=0.03, 25=0.0216, 50=0.0164, 100=0.0121, 250=0.00924, 500=0.0074, 1000=0.00545, 5000=0.00391 (USD)", Radiation Hardening=No, REACH SVHC="No SVHC", Stock 1=47740000, Supplier 1=Digi-Key, Termination=SMD/SMT, Voltage Rating (DC)=50V, Width=0.02inch
R67: library part RES0402, "0402 resistor", Case Code (Metric)=1005, Manufacturer=Panasonic, Manufacturer Part Number=ERJ-2RKF1002X, Max Operating Temperature=155°C, Max Power Dissipation=100mW, Min Operating Temperature=-55°C, Package Quantity=1, Resistance=10kR, Supplier Part Number 1=P10.0KLCT-ND, Temperature Coefficient=100ppm/°C, Tolerance=1%, Voltage Rating=50V, Case/Package=0402, Case Code (Imperial)=0402, ComponentLink1Description=http://industrial.panasonic.com/www-data/pdf/AOA0000/AOA0000CE2.pdf?src-supplier=Future+Electronics, ComponentLink1URL=http://industrial.panasonic.com/www-data/pdf/AOA0000/AOA0000CE2.pdf?src-supplier=Future+Electronics, ComponentLink2Description=http://industrial.panasonic.com/www-data/pdf/AOA0000/AOA0000CE2.pdf?src-supplier=Avnet+Europe, ComponentLink2URL=http://industrial.panasonic.com/www-data/pdf/AOA0000/AOA0000CE2.pdf?src-supplier=Avnet+Europe, ComponentLink3Description=https://industrial.panasonic.com/cdbs/www-data/pdf/RDA0000/DMA0000COL11.pdf?src-supplier=Mouser, ComponentLink3URL=https://industrial.panasonic.com/cdbs/www-data/pdf/RDA0000/DMA0000COL11.pdf?src-supplier=Mouser, ComponentLink4Description=http://www.farnell.com/datasheets/1678782.pdf?src-supplier=Element14, ComponentLink4URL=http://www.farnell.com/datasheets/1678782.pdf?src-supplier=Element14, ComponentLink5Description=http://www.farnell.com/datasheets/1911175.pdf?src-supplier=Farnell, ComponentLink5URL=http://www.farnell.com/datasheets/1911175.pdf?src-supplier=Farnell, ComponentLink6Description=http://www.jameco.com/Jameco/Products/ProdDS/1987020.pdf?src-supplier=Jameco, ComponentLink6URL=http://www.jameco.com/Jameco/Products/ProdDS/1987020.pdf?src-supplier=Jameco, ComponentLink7Description=http://industrial.panasonic.com/www-data/pdf/AOA0000/AOA0000CE2.pdf?src-supplier=Avnet, ComponentLink7URL=http://industrial.panasonic.com/www-data/pdf/AOA0000/AOA0000CE2.pdf?src-supplier=Avnet, ComponentLink8Description=http://www.alliedelec.com/m/d/623f45ff1957d936ff56d46fd1c28cac.pdf?src-supplier=Allied+Electronics, ComponentLink8URL=http://www.alliedelec.com/m/d/623f45ff1957d936ff56d46fd1c28cac.pdf?src-supplier=Allied+Electronics, Composition="Thick Film", Contact Plating=Tin, Depth=0.5mm, Features="Automotive AEC-Q200", Height=0.35mm, Lead Free="Lead Free", Length=1mm, Military Standard=Not, Mount="Surface Mount", Number of Pins=2, Number of Terminations=2, Packaging="Tape and Reel", Power Rating=100mW, Pricing 1="1=0.1, 10=0.045, 100=0.0183, 1000=0.00823, 2500=0.00715, 5000=0.0059 (USD)", Radiation Hardening=No, REACH SVHC="No SVHC", Stock 1=14350001, Supplier 1=Digi-Key, Termination=SMD/SMT, Voltage Rating (DC)=50V, Width=0.02inch
R68 R69 R70 R71 R72 R73: library part RES0402, "0402 resistor", Case Code (Metric)=1005, Manufacturer="TE Connectivity", Manufacturer Part Number=CRGCQ0402F330R, Max Operating Temperature=155°C, Max Power Dissipation=63mW, Min Operating Temperature=-55°C, Resistance=330R, Supplier Part Number 1=A129621CT-ND, Temperature Coefficient=100ppm/°C, Tolerance=1%, Case/Package=0402, Case Code (Imperial)=0402, Composition="Thick Film", Features="Moisture Resistant,Automotive AEC-Q200", Number of Terminations=2, Packaging="Tape and Reel", Pricing 1="1=0.1, 10=0.022, 100=0.009, 1000=0.00406, 2500=0.00352, 5000=0.00291 (USD)", Stock 1=224275, Supplier 1=Digi-Key
R74: library part RES0402, "0402 resistor", Case Code (Metric)=1005, Manufacturer=Yageo, Manufacturer Part Number=AC0402FR-0730KL, Max Operating Temperature=155°C, Max Power Dissipation=63mW, Min Operating Temperature=-55°C, Power Rating=62.5mW, Resistance=30kR, Supplier Part Number 1=YAG3474CT-ND, Temperature Coefficient=100ppm/°C, Tolerance=1%, Voltage Rating=50V, Case/Package=0402, Case Code (Imperial)=0402, Composition="Thick Film", Features="Moisture Resistant,Automotive AEC-Q200", Height=0.015inch, Lead Free="Lead Free", Length=0.039inch, Number of Terminations=2, Packaging="Tape and Reel", Pricing 1="1=0.1, 10=0.022, 100=0.009, 1000=0.00403, 2500=0.0035, 5000=0.00289 (USD)", Stock 1=756314, Supplier 1=Digi-Key, Termination=SMD/SMT, Weight=2.3E-05oz, Width=0.5mm
S1: library part "DPDT Switch", "DPDT Switch, customized for the pinout of the JS202011AQN switch.", Supplier Part Number 1=401-2000-ND, Supplier 1=Digi-Key
S2: library part "Pushbutton - Low Profile", "Schematic symbol for a generic 2-pin pushbutton, OFF-mom.", Supplier Part Number 1=CKN10587CT-ND, Supplier 1=Digi-Key
U1: "Single element non-inverting open drain buffer", Supplier Part Number 1=296-8486-1-ND, Supplier 1=Digi-Key
U4_FLASH1 U4_FLASH2 U4_FLASH3: "2.5V/3.0V 16 Mbit Serial Quad I/O (SQI) Flash Memory", Supplier Part Number 1=SST26VF016B-104I/SN-ND, ComponentLink1Description=SST25VF016B, ComponentLink1URL=https://www.digikey.ca/product-detail/en/microchip-technology/SST26VF016B-104I-SN/SST26VF016B-104I-SN-ND/5033651, Supplier 1=Digi-Key
U5: "SPI bus RTC with integrated crystal and SRAM", Supplier 1=Digi-Key, Supplier 2=Digi-Key, Supplier Part Number 2=DS3234SN#T&RCT-ND
U7: "SPI to I2C bridge.", Supplier Part Number 1=568-13690-1-ND, Supplier 1=Digikey
U12: "3.3V CAN Transceiver with Standby Mode, Loop-back 8-SOIC -40 to 125", Package="SOIC-8 Texas Instruments", Supplier Part Number 1=296-14639-5-ND, Availability=Good, MF="Texas Instruments", MP=SN65HVD233D, Price="2.39 USD", SnapEDA_Link=https://www.snapeda.com/parts/SN65HVD233D/Texas%20Instruments/view-part/?ref=snap, Supplier 1=Digi-Key
U15: "Hex non-inverting buffer with 3-state outputs", Supplier Part Number 1=296-33932-5-ND, Supplier 1=Digi-Key
U16: library part ATMEGA64M1_QFP, "Atmel 8-bit AVR microcontroller.", Supplier Part Number 1=ATMEGA64M1-AU-ND, Supplier 1=Digi-Key
Y2: library part AMB3B-8MHz, "8MHz Abracom 4-pin crystal.", Supplier Part Number 1=535-13456-1-ND, Supplier 1=Digi-Key

## Free pads (board coordinates)
  round 5.5 hole 3.4 unplated: 1(5.2,5) 2(55.2,5) 3(5.2,30) 4(55.2,30)

## Via types
v1: diameter 0.6, hole 0.3, Top Layer to Bottom Layer, tented both sides, 165 vias
v2: diameter 0.6, hole 0.3, Top Layer to Bottom Layer, 10 vias

## Nets (pads, with @x,y where several pads share a name; then routed paths per layer and width w, separated by ;. In a path a pad name is that pad's centre, name@x,y a point inside that pad or via, vN(x,y) a via of type N, cw(c..) or ccw(c..) an arc to the next point about the centre after c; other vN are vias at no path point)
+3V3: C1.2 C2.2 C4.2 C10_FLASH1.1 C10_FLASH2.1 C10_FLASH3.1 C38.2 C39.2 C46.2 C47.2 C48.2 DEBUG1.12 DEBUG1.13 J1.3 J1.14 J7.2 L4.1 R1.2 R2.2 R4.2 R5.2 R6.2 R8.1 R16.1 R17_FLASH1.2 R17_FLASH2.2 R17_FLASH3.2 R20.2 R74.2 U1.5 U4_FLASH1.3 U4_FLASH1.7 U4_FLASH1.8 U4_FLASH2.3 U4_FLASH2.7 U4_FLASH2.8 U4_FLASH3.3 U4_FLASH3.7 U4_FLASH3.8 U5.4 U7.12 U12.3 U15.16 U16.4 | length 44
  Top Layer w0.254: C10_FLASH1.1@1.773,22.773 C10_FLASH1.1@1.823,22.823 ; R17_FLASH3.2 C10_FLASH3.1 1.897,10.625 v2(3.031,10.625) U4_FLASH3.3 U4_FLASH3.3@4.518,10.643 ; R17_FLASH1.2 1.88,22.931 1.773,22.823 C10_FLASH1.1@1.823,22.823 ; R17_FLASH2.2 C10_FLASH2.1@1.9,16.608 ; C10_FLASH2.1@2.03,16.739 C10_FLASH2.1@1.9,16.608 ; U4_FLASH1.3@4.436,22.92 U4_FLASH1.3 v1(2.886,22.885) 2.824,22.823 C10_FLASH1.1 C10_FLASH1.1@1.823,22.823 ; U4_FLASH2.3 v2(2.946,16.739) 2.796,16.588 C10_FLASH2.1 C10_FLASH2.1@1.9,16.608 ; R1.2 v1(12.04,9.754) ; C38.2 14.141,23.198 C39.2 15.553,23.198 15.662,23.089 U12.3 ; C1.2 v1(18.11,5.004) 17.805,5.309 U5.4 U5.4@17.799,6.858 ; U5.4@17.653,7.004 U5.4@17.653,7.137 ; R20.2 v1(21.285,5.029) ; v1(28.727,8.788) C2.2 30.328,8.241 30.328,7.003 U1.5 ; v1(32.258,5.41) 32.499,5.651 R2.2 ; C47.2 33.611,14.964 C48.2 35.15,14.964 v1(35.236,14.878) U16.4 ; v1(48.956,11.014) L4.1 ; U7.12 v1(50.49,24.694) ; U15.16 v1(58.56,15.1)
  Bottom Layer w0.254: v1(15.1,14.261) 15.25,14.412 J1.14 ; v1(17.75,19.359) J1.3 ; v1(32.817,24.816) 33.438,24.816 R16.1 ; v1(38.049,27.356) R8.1 ; v1(45.365,28.016) R5.2 45.365,25.727 R6.2 45.387,25.705 R4.2 ; v1(50.49,24.694) 51.622,24.694 C4.2 ; v1(58.56,15.1) 59.279,15.1 C46.2 ; R74.2 59.385,21.278 v1(59.385,20.777)
  other v1: 15.596,23.241
+RTC_VBAT: DEBUG1.11 J1.18 U5.16 | length 37.8
  Top Layer w0.254: v1(17.17,17.475) 18.311,17.475 19.075,16.711 U5.16 ; U5.16@19.101,16.551 19.101,15.443 20.554,13.99 v1(24.994,13.99)
  Bottom Layer w0.254: J1.18 14.25,16.638 15.088,17.475 v1(17.17,17.475) ; v1(24.994,13.99) 24.994,11.268 29.307,6.954 29.307,2.57 30.353,1.524 36.839,1.524 DEBUG1.11
ANT_DEP_WARN: J1.9 U15.14 U16.29 | length 50.2
  Top Layer w0.254: v1(20.168,21.692) 20.244,21.692 20.955,20.98 v1(23.241,20.98) ; v1(31.339,18.353) 31.339,18.645 33.796,21.103 39.758,21.103 v1(41.002,19.859) U16.29 ; v1(56.667,16.434) 56.667,15.115 U15.14
  Bottom Layer w0.254: J1.9 16.25,20.752 17.317,21.819 20.04,21.819 v1(20.168,21.692) ; v1(23.241,20.98) 28.712,20.98 v1(31.339,18.353) ; v1(41.002,19.859) 41.266,19.595 44.512,19.595 46.05,21.133 52.68,21.133 56.667,17.145 v1(56.667,16.434)
ANT_I2C_SCL: DEBUG1.3 J1.7 R16.2 U7.8 | length 74.8
  Top Layer w0.254: v1(26.619,5.41) 26.619,8.385 28.293,10.058 v1(33.045,10.058) ; v1(36.754,23.444) 37,23.198 41.902,23.198 42.356,22.744 U7.8
  Bottom Layer w0.254: J1.7 16.75,18.747 16.564,18.561 15.508,18.561 15.502,18.567 14.91,18.567 12.827,16.485 12.827,6.775 12.529,6.477 11.805,6.477 11.409,6.082 11.409,2.381 11.934,1.856 15.766,1.856 16.796,2.885 DEBUG1.3 18.964,2.885 19.994,1.856 25.926,1.856 26.619,2.548 v1(26.619,5.41) ; v1(33.045,10.058) 33.045,10.585 35.123,12.663 35.123,12.67 35.816,13.362 35.816,14.108 35.814,14.11 35.814,14.636 35.816,14.638 35.816,22.884 35.523,23.177 R16.2 36.31,23.444 v1(36.754,23.444)
ANT_I2C_SDA: DEBUG1.4 J1.5 R8.2 U7.7 | length 50.9
  Top Layer w0.254: v1(20.244,20.853) 20.447,20.853 21.198,20.102 v2(21.783,20.102) 24.571,20.102 28.65,24.181 v1(41.834,24.181) 41.897,24.181 42.538,23.54 43.209,23.54 U7.7 ; DEBUG1.4 DEBUG1.4@20.42,3.024
  Bottom Layer w0.254: J1.5 17.25,20.888 17.317,20.955 20.142,20.955 v1(20.244,20.853) ; DEBUG1.4 20.595,3.06 20.595,9.523 20.579,9.539 21.717,10.677 21.717,20.037 v2(21.783,20.102) ; R8.2 41.326,26.404 41.326,24.689 v1(41.834,24.181)
ANT_REL_A: J1.19 R7.2 U15.10 U16.22 | length 60.3
  Top Layer w0.254: v1(43.485,21.971) 43.485,21.92 45.618,19.787 45.618,18.955 45.598,18.934 45.598,18.754 44.341,17.497 44.341,15.855 44.518,15.678 U16.22 48.393,15.678 v1(48.438,15.723) ; v1(53.746,16.307) 54.082,15.971 U15.10
  Bottom Layer w0.254: J1.19 13.75,26.755 14.297,27.302 35.817,27.302 37.973,25.146 39.561,25.146 R7.2 40.374,22.123 40.526,21.971 v1(43.485,21.971) ; v1(48.438,15.723) 49.022,16.307 v1(53.746,16.307)
ANT_REL_B: J1.20 R3.2 U15.12 U16.25 | length 57.4
  Top Layer w0.254: v1(19.804,19.583) 19.865,19.523 24.704,19.523 27.889,22.708 27.915,22.682 v1(32.029,22.682) 32.091,22.744 32.715,22.744 32.721,22.738 41.667,22.738 44.202,20.203 U16.25 44.398,18.974 v1(44.916,18.974) ; U15.12 55.382,16.266 v1(55.499,16.383)
  Bottom Layer w0.254: J1.20 13.75,16.747 15.062,18.059 v1(18.263,18.059) 18.28,18.059 v1(19.804,19.583) ; v1(32.029,22.682) 32.004,22.708 32.004,25.121 32.563,25.679 R3.2 ; v1(44.916,18.974) 44.916,19.414 46.05,20.549 52.578,20.549 55.499,17.628 v1(55.499,16.383)
AREF: C50.2 U16.21 | length 2.8
  Top Layer w0.254: U16.21 48.462,14.878 C50.2
AVCC: C49.2 L4.2 U16.19 | length 3.3
  Top Layer w0.254: U16.19 45.708,13.272 47.752,13.272 48.635,13.272 48.641,13.278 48.874,13.278 L4.2
BUF_EN_N: R67.2 U15.1 U15.15 | length 7.2
  Top Layer w0.254: U15.15 57.332,18.173 57.982,18.823 U15.1 v1(58.668,20.5)
  Bottom Layer w0.254: v1(58.668,20.5) 58.668,19.709 R67.2
CAN_CM_F: C40.2 R51.1 R55.1 | length 3
  Top Layer w0.254: R55.1 R51.1 25.8,23.038 25.883,23.121 v1(25.883,23.495)
  Bottom Layer w0.254: v1(25.883,23.495) 26.526,23.495 C40.2
CANH: DEBUG1.1 J1.15 R55.2 U12.7 | length 35.8
  Top Layer w0.254: v1(20.396,22.911) 20.396,23.47 21.286,24.359 U12.7 R55.2
  Bottom Layer w0.254: DEBUG1.1@12.823,2.885 DEBUG1.1 12.8,4.139 20.823,12.162 20.823,19.667 20.797,19.694 20.797,20.51 20.823,20.537 20.823,22.484 v1(20.396,22.911) 16.681,22.911 14.75,20.98 J1.15
CANL: DEBUG1.2 J1.17 R51.2 U12.6 | length 35
  Top Layer w0.254: v1(21.361,23.063) 22.792,23.063 U12.6 24.416,23.089 R51.2@24.467,23.038
  Bottom Layer w0.254: J1.17 14.25,21.054 16.665,23.47 20.136,23.47 20.156,23.49 20.934,23.49 v1(21.361,23.063) v1@21.184,23.063 ; DEBUG1.2 15.34,5.155 21.23,11.044 21.23,19.836 21.203,19.862 21.203,20.342 21.23,20.369 21.23,22.857 v1@21.158,22.928
CS_RTC: R1.1 U5.1 U16.26 | length 47.9
  Top Layer w0.254: R1.1 12.493,6.883 13.869,6.883 13.97,6.782 U5.1@14.021,6.782 ; U5.1 13.995,9.804 14.605,10.414 v1(27.076,10.414) ; v1(27.153,19.279) 27.153,20.252 27.653,20.752 31.318,20.752 32.898,22.331 41.463,22.331 42.123,21.671 42.159,21.671 43.402,20.428 U16.26
  Bottom Layer w0.254: v1(27.076,10.414) 27.076,19.202 v1(27.153,19.279)
EPS: R18.2 U16.17 | length 47.8
  Top Layer w0.254: v1(9.322,2.464) R18.2 ; v1(45.702,10.828) U16.17
  Bottom Layer w0.254: v1(9.322,2.464) 11.201,0.584 43.586,0.584 44.791,1.788 44.791,9.916 v1(45.702,10.828)
GND: C1.1 C2.1 C4.1 C10_FLASH1.2 C10_FLASH2.2 C10_FLASH3.2 C38.1 C39.1 C40.1 C46.1 C47.1 C48.1 C49.1 C50.1 C51.1 C52.1 D7.2 D8.2 D9.2 D10.2 D11.2 D12.2 DEBUG1.7 DEBUG1.14 DEBUG1.15 J1.1 J1.2 J1.12 J1.16 J7.6 R3.1 R7.1 R24.1 R63.1 R67.1 S2.2 U1.3 U4_FLASH1.4 U4_FLASH2.4 U4_FLASH3.4 U5.2 U5.7 U5.8 U5.9 U5.10 U5.11 U5.12 U5.13 U5.14 U5.15 U7.4 U12.2 U15.8 U16.5 U16.20 Y2.2 Y2.4 | length 81.3
  Top Layer w0.254: C10_FLASH1.2@1.773,21.423 2.668,21.423 v1(2.86,21.615) U4_FLASH1.4 U4_FLASH1.4@4.375,21.52 ; C10_FLASH3.2 1.993,9.355 v2(3.039,9.355) U4_FLASH3.4 U4_FLASH3.4@4.423,9.243 ; C10_FLASH2.2@1.93,15.188 2.16,15.418 v2(2.946,15.418) 2.997,15.469 U4_FLASH2.4 ; v1(11.408,30.112) 12.421,30.112 S2.2@15.621,30.112 ; C38.1 14.141,24.198 C39.1 15.689,24.198 v1(15.75,24.259) 15.85,24.359 U12.2 ; U5.2 15.265,5.588 v2(14.681,5.004) C1.1 C1.1@15.563,4.782 ; U5.15@20.371,16.082 20.367,16.078 21.542,16.078 U5.14 U5.13 v1(23.498,16.151) U5.12 U5.11 ; U5.7@21.641,6.782 v1(23.52,6.782) U5.10@25.451,6.782 ; R63.1 25.52,25.578 v1(26.111,25.578) ; U1.3 31.18,7.704 C2.1 v1(32.207,8.788) ; C47.1 33.904,13.401 C48.1 34.564,13.868 v1(35.236,13.868) 36.892,13.868 U16.5 ; Y2.4 37.973,7.963 v1(37.973,6.985) ; v1@40.792,14.529 40.869,14.605 v1(40.894,14.605) ; Y2.2@41.402,5.969 Y2.2@41.484,6.052 ; Y2.2 v1(43.72,5.658) ; v1(42.012,24.943) 42.088,24.943 42.489,25.344 U7.4 ; v1(47.168,14.021) 47.312,13.876 C50.1 ; v1(47.752,11.501) C49.1 ; v1(53.183,22.652) D7.2 D8.2 D9.2 ; v1(53.213,21.59) 53.432,21.371 U15.8 ; v1(53.264,9.119) D12.2 D10.2 D11.2
  Bottom Layer w0.254: v1(13.792,14.681) 14.394,14.681 14.75,15.038 J1.16 ; J1.12 15.75,14.806 v1(15.9,14.656) ; J1.2 18.923,14.917 v1(18.923,14.681) ; J1.1 18.25,19.686 18.567,19.369 v1(18.567,19.329) ; C40.1@27.483,23.639 C40.1 v1(27.576,24.224) ; v1(35.357,26.645) 35.497,26.504 R3.1 ; v1(37.998,25.959) R7.1 ; C51.1@39.827,7.053 39.98,7.206 v1(39.98,14.58) v1@40.132,14.427 ; C52.1 40.869,14.58 v1(40.894,14.605) ; v1@41.961,24.892 v1(42.012,24.943) ; R24.1 v1(46.987,27.937) ; v1(50.501,23.278) C4.1 ; R67.1 v1(59.316,18.803) ; v1(59.258,13.564) 59.258,14.08 C46.1
I2C_INRPT: R4.1 U7.14 U16.14 | length 23.8
  Top Layer w0.254: U16.14 42.602,11.36 v1(42.672,11.43) ; v1@48.743,18.161 48.793,18.212 v1(48.793,18.237) 48.793,19.025 51.562,21.793 51.562,25.668 51.236,25.994 U7.14
  Bottom Layer w0.254: v1(42.672,11.43) 42.672,12.113 48.793,18.234 v1(48.793,18.237) ; R4.1 v1(50.571,25.705)
LBK: R54.2 U16.30 | length 20.3
  Top Layer w0.254: R54.2 25.52,22.403 v1(25.959,22.403) ; v1(32.409,17.854) 32.409,19.14 33.837,20.569 39.544,20.569 40.202,19.911 U16.30
  Bottom Layer w0.254: v1(25.959,22.403) 28.109,22.403 32.409,18.103 v1(32.409,17.854)
LBK_R: R54.1 U12.5 | length 1.8
  Top Layer w0.254: U12.5 24.036,21.819 R54.1
LED1: D7.1 R68.1 | length 1.3
  Top Layer w0.254: D7.1 57.582,22.652 R68.1
LED2: D8.1 R69.1 | length 1.3
  Top Layer w0.254: D8.1 57.623,24.353 R69.1
LED3: D9.1 R70.1 | length 1.3
  Top Layer w0.254: D9.1 57.564,26.053 R70.1
LED4: D10.1 R71.1 | length 1.1
  Top Layer w0.254: D10.1 57.31,10.897 R71.1
LED5: D11.1 R72.1 | length 1.1
  Top Layer w0.254: D11.1 R72.1
LED6: D12.1 R73.1 | length 1.1
  Top Layer w0.254: D12.1 57.31,9.119 R73.1
MEM_CSn1: R17_FLASH1.1 U4_FLASH1.1 U16.16 | length 86.9
  Top Layer w0.254: v1@1.753,24.816 v1(1.803,24.867) 1.88,24.943 R17_FLASH1.1 ; R17_FLASH1.1@2.24,25.55 3.965,25.55 U4_FLASH1.1@4.089,25.425 ; v1(3.429,8.066) 3.316,8.066 1.79,6.54 1.79,3.392 3.826,1.356 49.13,1.356 49.581,1.806 49.581,7.975 48.081,9.474 44.906,9.474 U16.16
  Bottom Layer w0.254: v1(1.803,24.867) 2.134,24.536 2.134,9.249 2.716,8.666 2.729,8.666 3.069,8.327 3.069,8.314 3.316,8.066 v1(3.429,8.066)
MEM_CSn2: R17_FLASH2.1 U4_FLASH2.1 U16.23 | length 89.8
  Top Layer w0.254: v2(0.838,19.456) 0.932,19.363 R17_FLASH2.1 4.437,19.363 U4_FLASH2.1 ; v1(2.489,8.087) 2.489,7.814 1.383,6.708 1.383,6.331 1.372,6.319 1.383,6.307 1.383,3.205 3.639,0.949 49.299,0.949 49.987,1.638 49.987,15.951 49.474,16.464 48.323,16.464 48.309,16.478 U16.23
  Bottom Layer w0.254: v2(0.838,19.456) 0.838,14.991 0.782,14.935 1.727,13.99 1.727,8.871 2.256,8.343 2.256,8.32 v1(2.489,8.087)
MEM_CSn3: R17_FLASH3.1 U4_FLASH3.1 U16.24 | length 85.1
  Top Layer w0.254: v2(0.813,13.259) 1.841,13.259 R17_FLASH3.1 ; v1(1.676,8.103) 1.676,7.576 0.965,6.864 0.965,6.151 0.977,6.139 0.977,2.972 3.406,0.543 49.53,0.543 50.394,1.406 50.394,16.12 49.643,16.87 49.63,16.87 49.223,17.278 U16.24 ; R17_FLASH3.1@2.196,13.417 2.316,13.298 4.403,13.298 U4_FLASH3.1
  Bottom Layer w0.254: v2(0.813,13.259) 0.813,8.966 v1(1.676,8.103)
MISO: DEBUG1.10 U4_FLASH1.2 U4_FLASH2.2 U4_FLASH3.2 U5.19 U7.5 U16.8 | length 91.7
  Top Layer w0.254: U4_FLASH1.2 5.994,24.155 v1(6.147,24.308) ; U4_FLASH2.2 5.512,18.009 v1(6.147,18.644) ; U4_FLASH3.2 5.393,11.895 v1(6.096,12.598) 6.096,13.709 8.541,16.154 11.405,16.154 13.691,13.868 ; U5.19@15.311,16.105 15.311,15.381 15.089,15.159 15.076,15.159 14.737,14.82 14.737,14.806 13.799,13.868 13.691,13.868 ; v1(37.313,10.897) 37.313,11.467 U16.8 36.173,11.678 35.968,11.882 35.126,11.882 35.106,11.862 19.787,11.862 19.775,11.873 19.274,11.873 18.934,12.213 15.346,12.213 13.691,13.868 ; U7.5 44.953,24.694 v1(45.009,24.638) v1@45.151,24.638
  Bottom Layer w0.254: v1(6.096,12.598) 6.147,12.649 v1(6.147,18.644) v1(6.147,24.308) ; DEBUG1.10 35.66,3.453 34.62,4.493 34.62,7.547 35.41,8.336 35.419,8.336 36.454,9.371 36.454,9.627 ; v1(37.313,10.897) 36.454,10.038 36.454,9.627 ; v1(45.009,24.638) 45.187,24.46 45.187,21.889 44.176,20.879 39.361,20.879 36.652,18.17 36.652,12.852 34.473,10.673 34.473,9.8 34.646,9.627 36.454,9.627
MISO_A: J1.10 J7.1 U16.1 | length 50.4
  Top Layer w0.254: v1(20.117,17.736) 20.126,17.726 27.104,17.726 27.71,17.12 v1(28.143,17.12) ; v1(30.124,17.106) 30.296,17.278 32.166,17.278 32.169,17.275 v1@34.798,17.275 ; v1(30.759,25.07) 30.302,25.07 29.921,25.451 29.921,31.064 30.531,31.674 39.573,31.674 J7.1 ; v1(34.801,17.297) 34.811,17.288 v1@34.798,17.275 ; U16.1 37.099,17.275 v1@34.798,17.275
  Bottom Layer w0.254: J1.10 16.25,16.215 16.748,16.713 19.99,16.713 20.117,16.84 v1(20.117,17.736) ; v1(28.143,17.12) 30.111,17.12 v1(30.124,17.106) ; v1(30.759,25.07) 30.759,22.482 34.801,18.44 v1(34.801,17.297)
MOSI: DEBUG1.9 U4_FLASH1.5 U4_FLASH2.5 U4_FLASH3.5 U5.17 U7.6 U16.9 | length 90.6
  Top Layer w0.254: v1(7.391,8.636) 8.111,9.355 U4_FLASH3.5 ; v1(7.468,14.249) 7.468,14.326 8.611,15.469 9.706,15.597 9.736,15.594 10.802,15.469 11.074,15.469 14.91,11.633 v1(18.694,11.633) 18.872,11.455 35.274,11.455 35.295,11.476 35.8,11.476 37.174,10.102 ; v1(7.518,21.336) 7.798,21.615 U4_FLASH1.5 ; U5.17@17.831,16.082 17.637,15.888 17.88,15.645 17.88,14.473 18.332,14.021 18.593,14.021 v1(18.694,13.919) ; v1(35.281,9.017) 35.489,9.017 36.573,10.102 37.174,10.102 ; U16.9@38.627,10.102 37.174,10.102 ; U7.6 44.485,24.044 v1(44.602,23.927)
  Bottom Layer w0.254: v1@7.341,14.376 v1@7.391,14.376 ; v1(7.391,8.636) 7.437,8.682 7.437,9.638 7.391,9.684 v1@7.391,14.376 ; v1@7.391,21.311 v1@7.391,14.376 ; v1(7.468,14.249) 7.468,14.3 v1@7.391,14.376 ; v1(18.694,11.633) v1(18.694,13.919) ; DEBUG1.9 33.12,3.199 34.214,4.293 34.214,7.95 v1(35.281,9.017) 34.671,9.017 34.066,9.622 34.066,10.846 36.246,13.026 36.246,18.339 39.268,21.361 44.084,21.361 44.653,21.93 44.653,23.876 v1(44.602,23.927)
MOSI_A/TX: DEBUG1.5 J1.11 J7.4 J8.2 J8.4 U15.4 U16.2 | length 111.1
  Top Layer w0.254: v1(15.748,19.14) 15.748,19.074 16.183,18.639 28.707,18.639 v1(28.931,18.415) ; v1(22.987,4.648) 23.617,5.278 25.894,5.278 26.346,4.826 33.96,4.826 35.255,6.121 v1(35.255,6.223) ; v1(30.759,26.162) 30.759,30.658 31.242,31.14 37.109,31.14 J7.4 39.321,30.175 40.464,31.318 45.314,31.318 J8.4 J8.2 ; v1(31.09,16.612) 31.223,16.478 35.169,16.478 ; v1(34.693,16.002) 35.169,16.478 ; v1(39.243,15.24) 39.243,15.596 38.361,16.478 U16.2 35.169,16.478 ; v1(51.765,18.847) 55.575,18.847 56.032,19.304 U15.4
  Bottom Layer w0.254: v1(15.748,19.14) 15.748,20.188 J1.11 ; DEBUG1.5 22.96,4.621 v1(22.987,4.648) ; v1(28.931,18.415) 29.635,18.415 30.704,17.346 30.704,16.997 v1(31.09,16.612) ; v1(30.759,26.162) 30.607,26.162 29.307,24.862 29.307,22.636 33.909,18.034 33.909,16.256 34.163,16.002 v1(34.693,16.002) ; v1(35.255,6.223) 35.158,6.32 35.158,7.504 35.498,7.844 35.514,7.844 37.919,10.249 37.919,14.17 38.989,15.24 v1(39.243,15.24) 39.243,15.321 41.503,17.582 45.792,17.582 47.057,18.847 v1(51.765,18.847)
OUT1: R68.2 U15.3 | length 5.4
  Top Layer w0.254: U15.3 56.682,21.707 v1@56.693,21.717 ; R68.2 v1(59.202,22.703)
  Bottom Layer w0.254: v1@56.693,21.717 56.693,22.703 v1(59.202,22.703)
  other v1: 56.693,21.6
OUT2: R69.2 U15.5 | length 8.2
  Top Layer w0.254: U15.5 55.382,21.651 v1@55.397,21.666 ; R69.2 v1(59.167,24.343)
  Bottom Layer w0.254: v1@55.397,21.666 55.397,24.206 55.535,24.343 v1(59.167,24.343)
  other v1: 55.397,21.6
OUT3: R70.2 U15.7 | length 11.1
  Top Layer w0.254: U15.7 v1@54.082,21.647 ; R70.2 v1(59.207,25.984)
  Bottom Layer w0.254: v1@54.082,21.647 54.082,25.736 54.331,25.984 v1(59.207,25.984)
  other v1: 54.082,21.6
OUT4: R71.2 U15.9 | length 10.5